# EAGLE board 7seg2 (EAGLE 9.1.2)
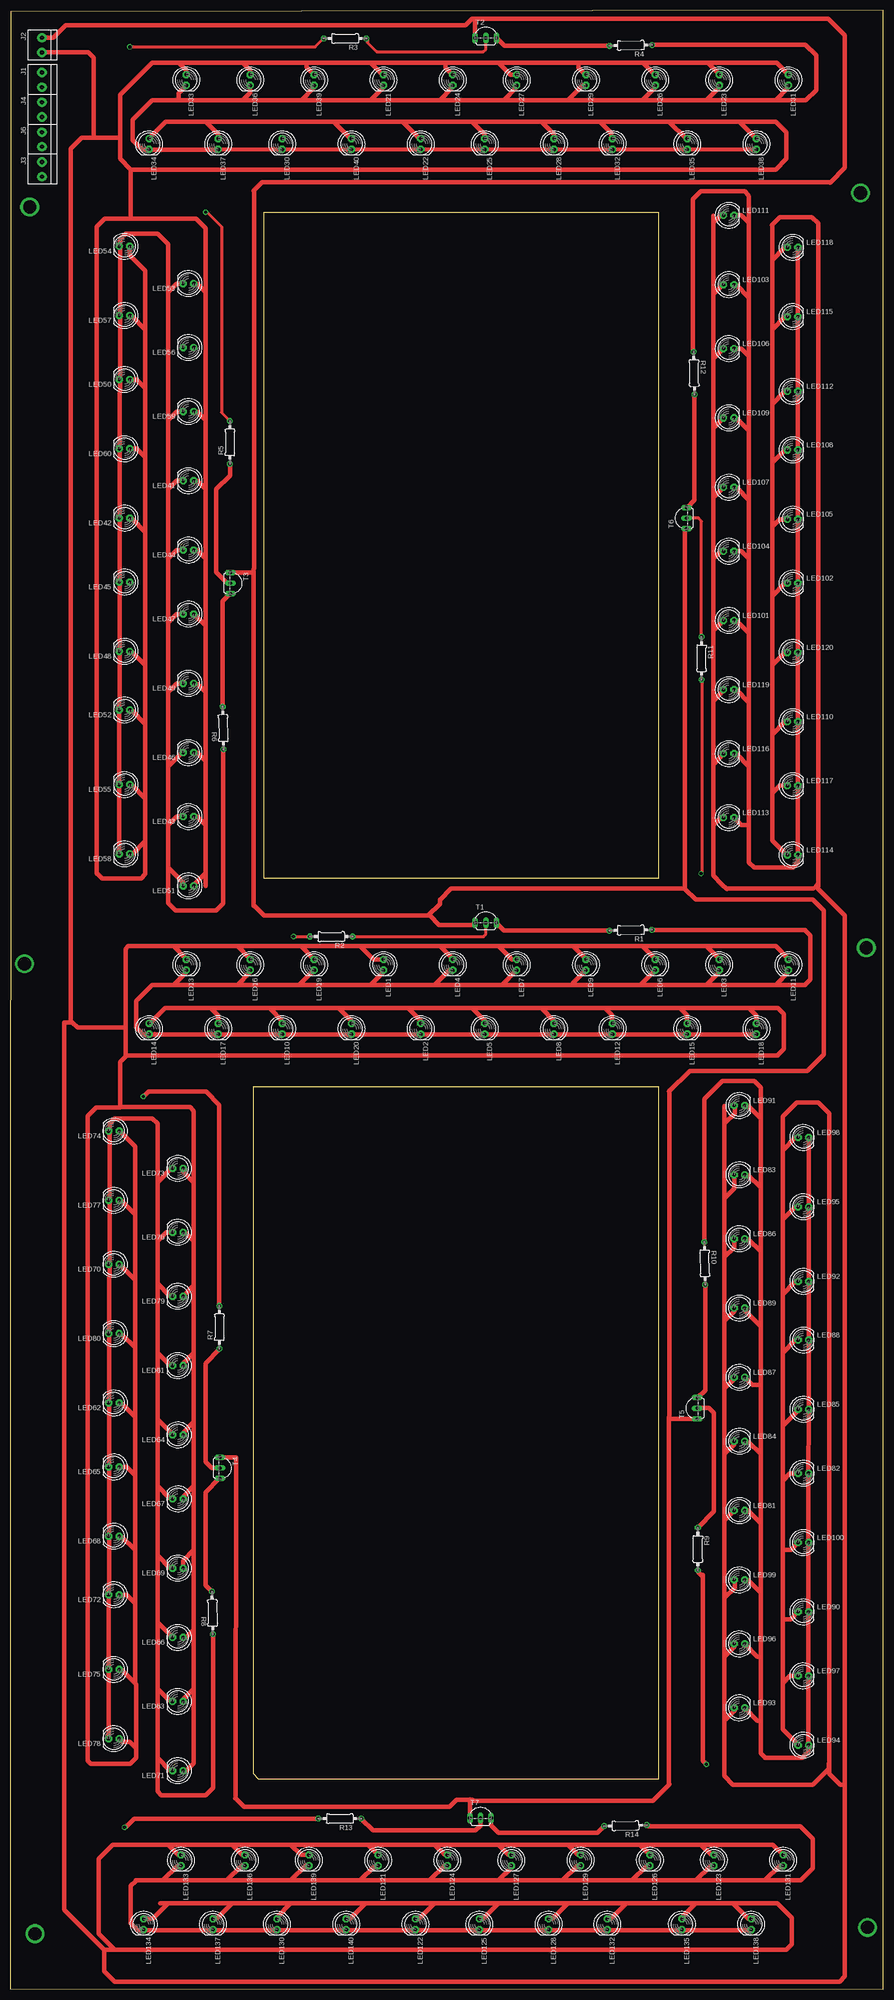
[diagram p0: board, top side]
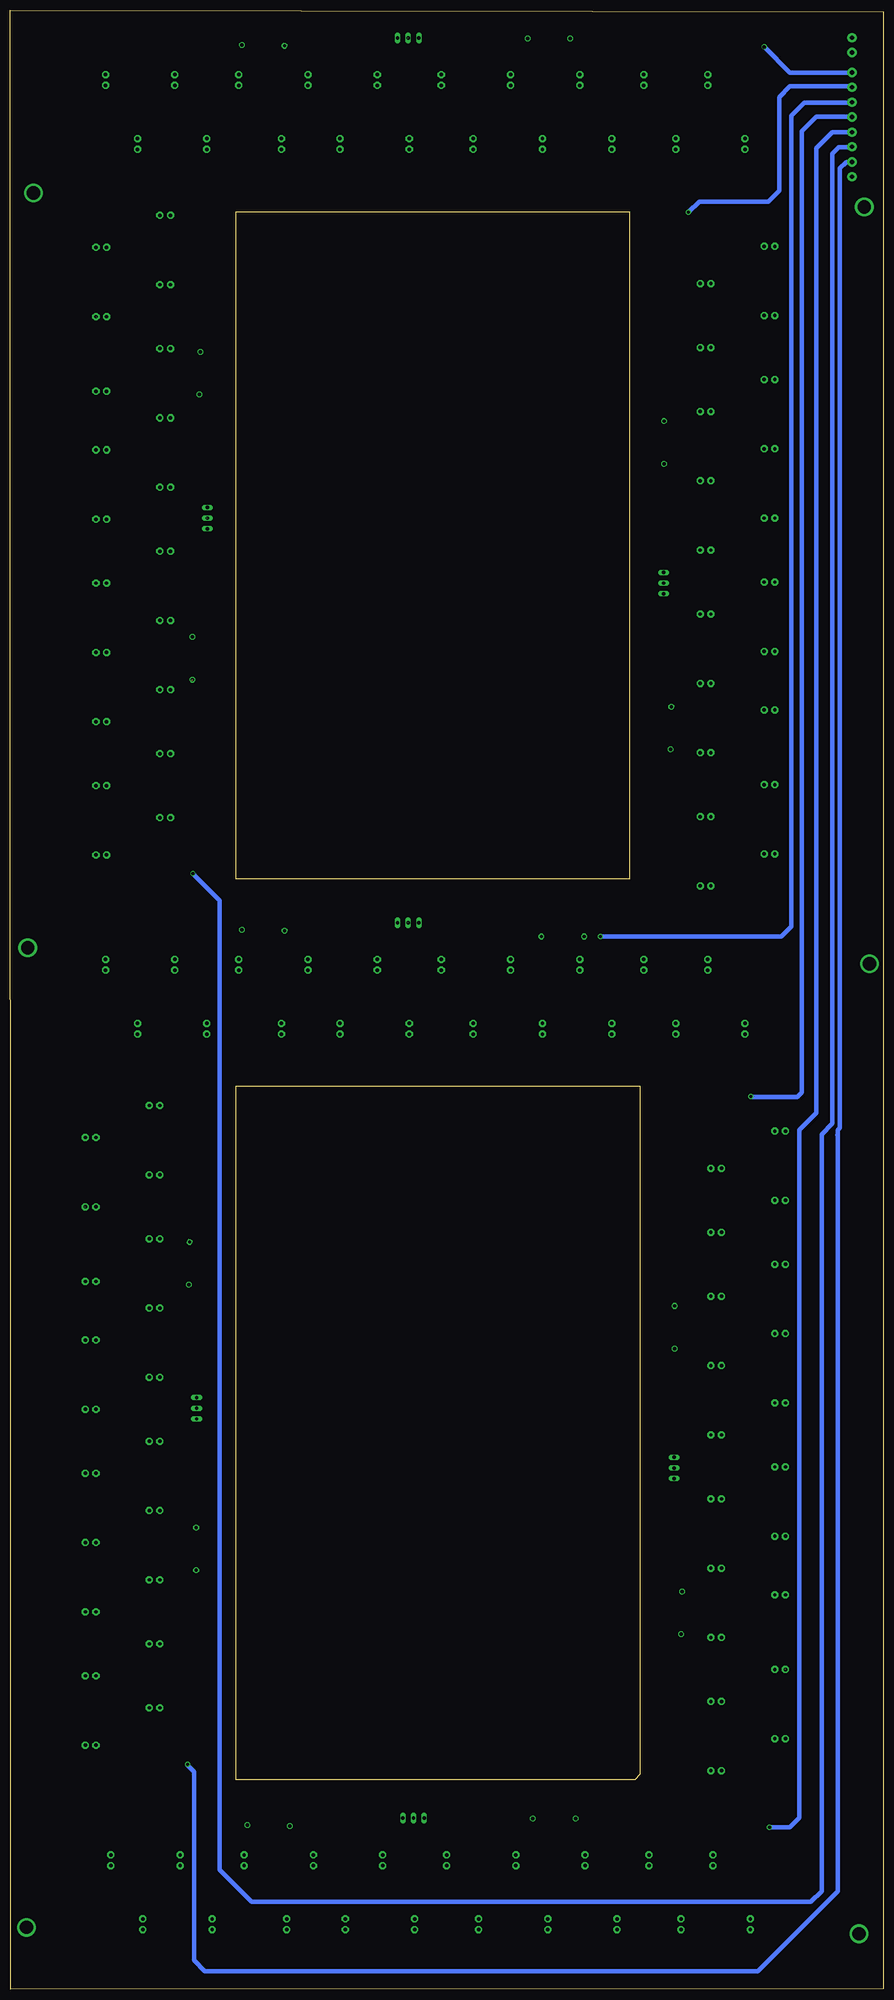
[diagram p1: board, bottom side, seen from below]

Size 208.07 x 471.41 mm. Coordinates in mm from the lower left corner, seen from the top.
Outline: 0,0.06 208.06,0 208.07,471.41 0.02,471.09 0,0.06
Outline: 60.45,423.36 154.43,423.36 154.43,264.61 60.45,264.61 60.45,423.36
Outline: 57.91,215.08 154.43,215.08 154.43,49.98 59.18,49.98 57.91,51.25 57.91,215.08
Copper layers (1*16): Top 0.035mm / dielectric 1.5mm / Bottom 0.035mm
Design rules "default": minimum track width 6mil, minimum drill 0.35mm, track to track 6mil, track to pad 6mil, pad to pad 6mil, via to via 6mil, smd to smd 6mil, copper to edge 40mil, drill to drill 6mil, minimum pad ring 10mil, minimum via ring 8mil, stop-mask expansion 4mil, vias tented up to drill 0mil, thermal gap 10mil
Net classes: 0 default: width 0.762 mm, drill 0.762 mm, clearance 0.635 mm; 1 power: width 1.016 mm, drill 0.762 mm, clearance 0.762 mm

## Footprints (pad centres in the part's own frame; a part is rotated, then mirrored left to right if it is on the bottom)
1X2-3.5MM = drill 1 pad 2.184: 1 1.8,0; 2 -1.7,0
LED5MM = drill 0.813 pad 1.676 octagon: A -1.27,0; K 1.27,0
BEAGLEBONEBLACK_MOUNTING_HOLE = drill 3.175 pad 4.445: P$1 0,0
0207/10 = drill 0.813 octagon: 1 -5.08,0; 2 5.08,0
TO92-EBC-OVAL = drill 0.813 long: B 0,-1.27; C 2.54,-1.27; E -2.54,-1.27

## Placement (x,y rotation side)
J1  1X2-3.5MM  [1X2-3.5MM]  7.49,454.86 90 top
J2  1X2-3.5MM  [1X2-3.5MM]  7.49,463.11 90 top
J3  1X2-3.5MM  [1X2-3.5MM]  7.49,433.52 90 top
J4  1X2-3.5MM  [1X2-3.5MM]  7.49,447.74 90 top
J6  1X2-3.5MM  [1X2-3.5MM]  7.49,440.63 90 top
LED1  [LED5MM]  88.9,244.04 270 top
LED2  [LED5MM]  97.79,228.8 270 top
LED3  [LED5MM]  168.91,244.04 270 top
LED4  [LED5MM]  105.41,244.04 270 top
LED5  [LED5MM]  113.03,228.8 270 top
LED6  [LED5MM]  153.67,244.04 270 top
LED7  [LED5MM]  120.65,244.04 270 top
LED8  [LED5MM]  129.54,228.8 270 top
LED9  [LED5MM]  137.16,244.04 270 top
LED10  [LED5MM]  64.77,228.8 270 top
LED11  [LED5MM]  185.42,244.04 270 top
LED12  [LED5MM]  143.51,228.8 270 top
LED13  [LED5MM]  41.91,244.04 270 top
LED14  [LED5MM]  33.02,228.8 270 top
LED15  [LED5MM]  161.29,228.8 270 top
LED16  [LED5MM]  57.15,244.04 270 top
LED17  [LED5MM]  49.53,228.8 270 top
LED18  [LED5MM]  177.8,228.8 270 top
LED19  [LED5MM]  72.39,244.04 270 top
LED20  [LED5MM]  81.28,228.8 270 top
LED21  [LED5MM]  88.9,454.86 270 top
LED22  [LED5MM]  97.79,439.62 270 top
LED23  [LED5MM]  168.91,454.86 270 top
LED24  [LED5MM]  105.41,454.86 270 top
LED25  [LED5MM]  113.03,439.62 270 top
LED26  [LED5MM]  153.67,454.86 270 top
LED27  [LED5MM]  120.65,454.86 270 top
LED28  [LED5MM]  129.54,439.62 270 top
LED29  [LED5MM]  137.16,454.86 270 top
LED30  [LED5MM]  64.77,439.62 270 top
LED31  [LED5MM]  185.42,454.86 270 top
LED32  [LED5MM]  143.51,439.62 270 top
LED33  [LED5MM]  41.91,454.86 270 top
LED34  [LED5MM]  33.02,439.62 270 top
LED35  [LED5MM]  161.29,439.62 270 top
LED36  [LED5MM]  57.15,454.86 270 top
LED37  [LED5MM]  49.53,439.62 270 top
LED38  [LED5MM]  177.8,439.62 270 top
LED39  [LED5MM]  72.39,454.86 270 top
LED40  [LED5MM]  81.28,439.62 270 top
LED41  [LED5MM]  42.42,359.35 180 top
LED42  [LED5MM]  27.18,350.46 180 top
LED43  [LED5MM]  42.42,279.34 180 top
LED44  [LED5MM]  42.42,342.84 180 top
LED45  [LED5MM]  27.18,335.22 180 top
LED46  [LED5MM]  42.42,294.58 180 top
LED47  [LED5MM]  42.42,327.6 180 top
LED48  [LED5MM]  27.18,318.71 180 top
LED49  [LED5MM]  42.42,311.09 180 top
LED50  [LED5MM]  27.18,383.48 180 top
LED51  [LED5MM]  42.42,262.83 180 top
LED52  [LED5MM]  27.18,304.74 180 top
LED53  [LED5MM]  42.42,406.34 180 top
LED54  [LED5MM]  27.18,415.23 180 top
LED55  [LED5MM]  27.18,286.96 180 top
LED56  [LED5MM]  42.42,391.1 180 top
LED57  [LED5MM]  27.18,398.72 180 top
LED58  [LED5MM]  27.18,270.45 180 top
LED59  [LED5MM]  42.42,375.86 180 top
LED60  [LED5MM]  27.18,366.97 180 top
LED61  [LED5MM]  39.88,148.53 180 top
LED62  [LED5MM]  24.64,139.64 180 top
LED63  [LED5MM]  39.88,68.52 180 top
LED64  [LED5MM]  39.88,132.02 180 top
LED65  [LED5MM]  24.64,124.4 180 top
LED66  [LED5MM]  39.88,83.76 180 top
LED67  [LED5MM]  39.88,116.78 180 top
LED68  [LED5MM]  24.64,107.89 180 top
LED69  [LED5MM]  39.88,100.27 180 top
LED70  [LED5MM]  24.64,172.66 180 top
LED71  [LED5MM]  39.88,52.01 180 top
LED72  [LED5MM]  24.64,93.92 180 top
LED73  [LED5MM]  39.88,195.52 180 top
LED74  [LED5MM]  24.64,204.41 180 top
LED75  [LED5MM]  24.64,76.14 180 top
LED76  [LED5MM]  39.88,180.28 180 top
LED77  [LED5MM]  24.64,187.9 180 top
LED78  [LED5MM]  24.64,59.63 180 top
LED79  [LED5MM]  39.88,165.04 180 top
LED80  [LED5MM]  24.64,156.15 180 top
LED81  [LED5MM]  173.73,113.99 0 top
LED82  [LED5MM]  188.97,122.88 0 top
LED83  [LED5MM]  173.73,194 0 top
LED84  [LED5MM]  173.73,130.5 0 top
LED85  [LED5MM]  188.97,138.12 0 top
LED86  [LED5MM]  173.73,178.76 0 top
LED87  [LED5MM]  173.73,145.74 0 top
LED88  [LED5MM]  188.97,154.63 0 top
LED89  [LED5MM]  173.73,162.25 0 top
LED90  [LED5MM]  188.97,89.86 0 top
LED91  [LED5MM]  173.73,210.51 0 top
LED92  [LED5MM]  188.97,168.6 0 top
LED93  [LED5MM]  173.73,67 0 top
LED94  [LED5MM]  188.97,58.11 0 top
LED95  [LED5MM]  188.97,186.38 0 top
LED96  [LED5MM]  173.73,82.24 0 top
LED97  [LED5MM]  188.97,74.62 0 top
LED98  [LED5MM]  188.97,202.89 0 top
LED99  [LED5MM]  173.73,97.48 0 top
LED100  [LED5MM]  188.97,106.37 0 top
LED101  [LED5MM]  171.19,326.08 0 top
LED102  [LED5MM]  186.43,334.97 0 top
LED103  [LED5MM]  171.19,406.09 0 top
LED104  [LED5MM]  171.19,342.59 0 top
LED105  [LED5MM]  186.43,350.21 0 top
LED106  [LED5MM]  171.19,390.85 0 top
LED107  [LED5MM]  171.19,357.83 0 top
LED108  [LED5MM]  186.43,366.72 0 top
LED109  [LED5MM]  171.19,374.34 0 top
LED110  [LED5MM]  186.43,301.95 0 top
LED111  [LED5MM]  171.19,422.6 0 top
LED112  [LED5MM]  186.43,380.69 0 top
LED113  [LED5MM]  171.19,279.09 0 top
LED114  [LED5MM]  186.43,270.2 0 top
LED115  [LED5MM]  186.43,398.47 0 top
LED116  [LED5MM]  171.19,294.33 0 top
LED117  [LED5MM]  186.43,286.71 0 top
LED118  [LED5MM]  186.43,414.98 0 top
LED119  [LED5MM]  171.19,309.57 0 top
LED120  [LED5MM]  186.43,318.46 0 top
LED121  [LED5MM]  87.63,30.68 270 top
LED122  [LED5MM]  96.52,15.44 270 top
LED123  [LED5MM]  167.64,30.68 270 top
LED124  [LED5MM]  104.14,30.68 270 top
LED125  [LED5MM]  111.76,15.44 270 top
LED126  [LED5MM]  152.4,30.68 270 top
LED127  [LED5MM]  119.38,30.68 270 top
LED128  [LED5MM]  128.27,15.44 270 top
LED129  [LED5MM]  135.89,30.68 270 top
LED130  [LED5MM]  63.5,15.44 270 top
LED131  [LED5MM]  184.15,30.68 270 top
LED132  [LED5MM]  142.24,15.44 270 top
LED133  [LED5MM]  40.64,30.68 270 top
LED134  [LED5MM]  31.75,15.44 270 top
LED135  [LED5MM]  160.02,15.44 270 top
LED136  [LED5MM]  55.88,30.68 270 top
LED137  [LED5MM]  48.26,15.44 270 top
LED138  [LED5MM]  176.53,15.44 270 top
LED139  [LED5MM]  71.12,30.68 270 top
LED140  [LED5MM]  80.01,15.44 270 top
MGT2  BEAGLEBONEBLACK_MOUNTING_HOLE  [BEAGLEBONEBLACK_MOUNTING_HOLE]  203.96,248.1 0 top
MGT3  BEAGLEBONEBLACK_MOUNTING_HOLE  [BEAGLEBONEBLACK_MOUNTING_HOLE]  4.57,424.63 0 top
MGT4  BEAGLEBONEBLACK_MOUNTING_HOLE  [BEAGLEBONEBLACK_MOUNTING_HOLE]  202.61,427.9 0 top
MGT6  BEAGLEBONEBLACK_MOUNTING_HOLE  [BEAGLEBONEBLACK_MOUNTING_HOLE]  3.3,244.29 0 top
MGT8  BEAGLEBONEBLACK_MOUNTING_HOLE  [BEAGLEBONEBLACK_MOUNTING_HOLE]  5.84,13.15 0 top
MGT9  BEAGLEBONEBLACK_MOUNTING_HOLE  [BEAGLEBONEBLACK_MOUNTING_HOLE]  204.23,14.69 0 top
R1  [0207/10]  147.83,252.29 181.2 top
R2  [0207/10]  76.45,250.77 180 top
R3  [0207/10]  79.75,464.76 180 top
R4  [0207/10]  147.83,463.11 181.2 top
R5  [0207/10]  52.32,368.5 90 top
R6  [0207/10]  50.67,300.42 91.2 top
R7  [0207/10]  49.78,157.68 90 top
R8  [0207/10]  48.13,89.6 91.2 top
R9  [0207/10]  163.83,104.84 270 top
R10  [0207/10]  165.48,172.92 271.2 top
R11  [0207/10]  164.72,317.06 270 top
R12  [0207/10]  162.94,385.01 271.2 top
R13  [0207/10]  78.48,40.58 180 top
R14  [0207/10]  146.56,38.93 181.2 top
T1  2N2222  [TO92-EBC-OVAL]  113.28,255.34 0 top
T2  2N2222  [TO92-EBC-OVAL]  113.28,466.16 0 top
T3  2N2222  [TO92-EBC-OVAL]  53.72,334.97 270 top
T4  2N2222  [TO92-EBC-OVAL]  51.18,124.15 270 top
T5  2N2222  [TO92-EBC-OVAL]  162.43,138.37 90 top
T6  2N2222  [TO92-EBC-OVAL]  159.89,350.46 90 top
T7  2N2222  [TO92-EBC-OVAL]  112.01,41.98 0 top

## Library data of the parts
J1-J4 J6 LED1-LED140 T1-T7 = adafruit
MGT2-MGT4 MGT6 MGT8 MGT9 = BeagleBone_Black_Wireless
R1-R14 = resistor

## Nets
N$4: R2.2
N$5: R2.1 T1.B
N$10: R3.1 T2.B
N$12: R3.2
N$17: T3.B
N$18 [power]: LED55.K
N$19: R5.2
N$24 [power]: T4.B
N$25 [power]: LED75.K
N$32 [power]: LED98.K
N$38: R11.1 T6.B
N$39 [power]: LED118.K
N$40: R11.2
N$45: T7.B
N$47: R13.2
S$9 [power]: R14.1
S$46: R8.2
S$52: R9.1
S$53 [power]: R10.2
S$54 [power]: R14.2
S$55 [power]: R4.2
S$56 [power]: R12.2
S$57: R5.1
S$58 [power]: R6.2
S$59 [power]: R1.2
S$142 [power]: T6.E
S$153 [power]: LED32.K
S$154 [power]: LED35.K
S$166 [power]: LED52.K
S$176 [power]: LED12.K
S$177 [power]: LED15.K
S$188 [power]: LED72.K
S$189 [power]: R10.1
S$200 [power]: LED132.K
S$201 [power]: LED135.K
S$202 [power]: R12.1
S$213 [power]: LED92.K
S$214 [power]: LED95.K
S$227 [power]: LED112.K
S$228 [power]: LED115.K

## Tracks (layer width: path | path; a pad name or v marks a point on that pad's centre or on a via)
GND
  Top 1.016: 157.1,214.06 157.1,136.47 156.97,136.34 156.97,135.83 | 156.97,135.83 163.57,135.83 | 156.97,135.83 156.97,48.71 157.1,48.84
GND1
  Top 1.016: 189.48,450.03 182.37,450.03 | 182.37,450.03 165.86,450.03 | 165.86,450.03 150.62,450.03 | 150.62,450.03 132.84,450.03 | 132.84,450.03 117.6,450.03 | 117.6,450.03 102.36,450.03 | 102.36,450.03 85.85,450.03 | 85.85,450.03 69.34,450.03 | 69.34,450.03 55.37,450.03 | 55.37,450.03 40.13,450.03 | 40.13,450.03 33.78,450.03 29.08,445.33 29.08,440.5 31.37,438.22 | 40.13,450.03 40.13,451.68 41.91,453.46 | 55.37,450.03 57.15,451.81 57.15,453.46 | 69.34,450.03 72.39,453.08 72.39,453.46 | 85.85,450.03 88.9,453.08 88.9,453.46 | 102.36,450.03 105.28,452.95 105.28,453.59 | 117.6,450.03 120.65,453.08 120.65,453.59 | 132.84,450.03 136.4,453.59 137.16,453.59 | 150.62,450.03 153.67,453.08 153.67,453.46 | 165.86,450.03 168.91,453.08 168.91,453.59 | 182.37,450.03 185.42,453.08 185.42,453.59
GND2
  Top 1.016: 37.59,267.15 37.59,258.77 39.37,256.99 49.02,256.99 50.67,258.64 | 37.59,267.15 37.59,277.31 | 37.59,277.31 37.59,291.28 | 37.59,291.28 37.59,309.06 | 37.59,309.06 37.59,325.57 | 37.59,325.57 37.59,340.81 | 37.59,340.81 37.59,357.32 | 37.59,357.32 37.59,373.83 | 37.59,373.83 37.59,404.31 | 37.59,404.31 37.59,415.74 | 37.59,267.15 41.15,263.59 41.15,262.96 | 37.59,277.31 39.62,279.34 41.27,279.34 | 37.59,291.28 41.02,294.71 41.27,294.71 | 37.59,309.06 39.62,311.09 41.15,311.09 | 37.59,325.57 39.62,327.6 41.15,327.6 | 37.59,340.81 39.62,342.84 41.27,342.84 | 37.59,357.32 39.62,359.35 41.15,359.35 | 37.59,373.83 39.62,375.86 41.15,375.86 | 37.59,404.31 39.62,406.34 41.27,406.34
GND3
  Top 1.016: 189.48,239.21 189.23,239.21 182.37,239.21 | 182.37,239.21 165.86,239.21 | 165.86,239.21 150.11,239.21 | 150.11,239.21 134.11,239.21 | 134.11,239.21 117.09,239.21 | 117.09,239.21 101.09,239.21 | 101.09,239.21 85.85,239.21 | 85.85,239.21 68.83,239.21 | 68.83,239.21 54.1,239.21 | 54.1,239.21 38.86,239.21 | 38.86,239.21 33.78,239.21 | 38.86,239.21 41.78,242.13 41.78,242.77 | 54.1,239.21 57.15,242.26 57.15,242.64 | 85.85,239.21 88.9,242.26 88.9,242.77 | 68.83,239.21 72.39,242.77 | 101.09,239.21 104.52,242.64 105.41,242.64 | 117.09,239.21 120.65,242.77 | 134.11,239.21 134.11,239.72 137.16,242.77 | 150.11,239.21 153.54,242.64 | 165.86,239.21 168.91,242.26 168.91,242.77 | 182.37,239.21 185.54,242.38 185.54,242.64
GND4
  Top 1.016: 35.05,55.06 35.05,49.34 35.05,47.95 35.05,47.06 35.94,46.17 46.48,46.17 48.26,47.95 | 35.05,55.06 35.05,71.57 | 35.05,71.57 35.05,88.08 | 35.05,88.08 35.05,103.32 | 35.05,103.32 35.05,119.83 | 35.05,119.83 35.05,136.34 | 35.05,136.34 35.05,151.58 | 35.05,151.58 35.05,168.09 | 35.05,168.09 35.05,178.25 | 35.05,178.25 35.05,192.22 | 35.05,192.22 35.05,206.19 | 35.05,55.06 38.1,52.01 38.61,52.01 | 35.05,71.57 37.97,68.65 38.61,68.65 | 35.05,88.08 35.05,87.32 38.61,83.76 | 35.05,103.32 38.1,100.27 38.61,100.27 | 35.05,119.83 37.97,116.91 38.61,116.91 | 35.05,136.34 35.05,135.7 38.73,132.02 | 35.05,151.58 38.1,148.53 38.61,148.53 | 35.05,168.09 37.97,165.17 38.61,165.17 | 35.05,178.25 37.08,180.28 38.61,180.28 | 35.05,192.22 38.35,195.52 38.48,195.52
GND5
  Top 1.016: 188.21,25.85 179.83,25.85 | 179.83,25.85 163.32,25.85 | 163.32,25.85 148.08,25.85 | 148.08,25.85 131.57,25.85 | 131.57,25.85 116.33,25.85 | 116.33,25.85 102.36,25.85 99.82,25.85 | 99.82,25.85 83.31,25.85 | 83.31,25.85 66.8,25.85 | 66.8,25.85 51.56,25.85 | 51.56,25.85 36.32,25.85 | 36.32,25.85 29.84,25.85 29.84,25.72 28.7,24.58 28.7,15.69 30.22,14.17 | 179.83,25.85 183.39,29.41 184.15,29.41 | 163.32,25.85 166.88,29.41 167.76,29.41 | 148.08,25.85 151.51,29.28 152.52,29.28 | 131.57,25.85 135.13,29.41 135.76,29.41 | 116.33,25.85 119.38,28.9 119.38,29.41 | 99.82,25.85 103.5,29.53 104.14,29.53 | 83.31,25.85 86.74,29.28 87.75,29.28 | 66.8,25.85 70.48,29.53 71.12,29.53 | 51.56,25.85 55.12,29.41 55.88,29.41 | 36.32,25.85 39.88,29.41 40.76,29.41
GND6
  Top 1.016: 178.81,214.57 178.81,207.46 | 178.81,207.46 178.81,190.95 | 178.81,190.95 178.81,175.71 | 178.81,175.71 178.81,157.93 | 178.81,157.93 178.81,143.96 | 178.81,143.96 178.81,127.45 | 178.81,127.45 178.81,110.94 | 178.81,110.94 178.81,94.43 | 178.81,94.43 178.81,79.19 | 178.81,79.19 178.81,63.95 | 178.81,63.95 178.81,56.2 179.83,55.19 179.83,55.06 188.72,55.06 190.12,56.46 | 178.81,207.46 175.77,210.51 175,210.51 | 178.81,190.95 175.77,194 175,194 | 178.81,175.71 175.77,178.76 175,178.76 | 178.81,157.93 175,161.74 175,162.25 | 178.81,143.96 176.78,143.96 175,145.74 | 178.81,127.45 175.89,130.37 175,130.37 | 178.81,110.94 175.77,113.99 175,113.99 | 178.81,94.43 175.77,97.48 175,97.48 | 178.81,79.19 178.05,79.19 175,82.24 | 178.81,63.95 178.05,63.95 175,67
GND7
  Top 1.016: 176.02,427.17 176.02,420.82 | 176.02,420.82 176.02,403.04 | 176.02,403.04 176.02,389.07 | 176.02,389.07 176.02,371.29 | 176.02,371.29 176.02,354.78 | 176.02,354.78 176.02,340.81 | 176.02,340.81 176.02,323.03 | 176.02,323.03 176.02,306.52 | 176.02,306.52 176.02,291.28 | 176.02,291.28 176.02,277.31 | 176.02,277.31 176.02,268.42 177.29,267.15 186.43,267.15 187.7,268.42 | 176.02,420.82 174.24,422.6 172.46,422.6 | 176.02,403.04 172.97,406.09 172.59,406.09 | 176.02,389.07 174.24,390.85 172.34,390.85 | 176.02,371.29 172.97,374.34 172.46,374.34 | 176.02,354.78 173.1,357.7 172.46,357.7 | 176.02,340.81 174.24,342.59 172.46,342.59 | 176.02,323.03 173.1,325.95 172.46,325.95 | 176.02,306.52 172.97,309.57 172.59,309.57 | 176.02,291.28 172.97,294.33 172.59,294.33 | 176.02,277.31 174.24,277.31 172.46,279.09
N$4
  Top 0.762: 67.31,250.77 R2.2
N$5  (1 unrouted)
  Top 0.762: R2.1 87.25,250.77 112.77,250.77 113.28,251.27 T1.B
N$10  (1 unrouted)
  Top 0.762: R3.1 85.09,464.51 85.09,463.75 87.25,461.59 112.77,461.59 113.28,462.09 T2.B
N$12
  Top 0.762: 28.3,462.73 72.64,462.73 R3.2
N$18
  Top 0.762: 25.92,286.98 LED55.K
N$19
  Top 0.762: R5.2 50.29,375.61 50.29,419.95 46.76,423.49 46.35,423.49
N$24
  Top 1.016: 49.78,152.34 46.48,149.04 46.48,125.58 47.91,124.15 T4.B | T4.B
N$25  (1 unrouted)
  Top 0.762: 23.38,76.16 LED75.K
N$26
  Top 1.016: 31.75,212.67 32.89,213.81 46.61,213.81 49.78,210.63 49.78,162.76
N$33
  Top 1.016: 164.97,98.62 164.97,98.24 | 164.97,98.24 164.97,54.42 165.86,53.54 | 164.97,98.24 163.95,99.26 163.95,99.64
N$38  (1 unrouted)
  Top 0.762: R11.1 164.72,349.7 163.95,350.46 T6.B
N$40  (1 unrouted)
  Top 0.762: 164.72,311.91 164.72,265.79
N$45
  Top 1.016: 83.69,40.45 86.36,37.79 110.87,37.79 112.01,38.93 T7.B
N$47
  Top 1.016: R13.2 29.46,40.58 27.43,38.55
S$1
  Top 1.016: 43.69,262.83 43.69,263.09 46.48,265.88 | 43.81,279.34 44.45,279.34 46.48,277.31 | 46.48,265.88 46.48,262.83 | 43.69,294.58 44.45,294.58 46.48,292.55 | 46.48,277.31 46.48,265.88 | 43.69,310.96 44.57,310.96 46.48,309.06 | 46.48,292.55 46.48,277.31 | 43.69,327.6 46.48,324.81 46.48,324.3 | 46.48,309.06 46.48,292.55 | 43.69,342.84 44.45,342.84 46.48,340.81 | 46.48,324.3 46.48,309.06 | 43.69,359.35 44.45,359.35 46.48,357.32 | 46.48,340.81 46.48,324.3 | 43.81,375.86 44.45,375.86 46.48,373.83 | 46.48,357.32 46.48,340.81 | 43.69,406.34 44.45,406.34 46.48,404.31 | 46.48,373.83 46.48,357.32 | 46.48,404.31 46.48,373.83 | 46.48,404.31 46.48,419.55 44.19,421.84 28.45,421.84 | 28.45,421.84 28.7,422.09 28.7,433.52 | 28.7,433.52 182.37,433.52 | 28.7,433.52 26.16,436.06 26.16,441.14 26.16,451.3 33.78,458.92 | 28.45,421.84 22.48,421.84 20.57,419.93
S$2  (via drill 0.76)
  Bottom 1.016: v28.45,462.73 22.35,456.63 7.49,456.63
S$3
  Bottom 1.016: 7.49,446.09 16,446.09 19.41,442.68 19.41,213.67 20.54,212.54 31.62,212.54
S$4
  Bottom 1.016: 7.49,442.41 12.19,442.41 16,438.6 16,208.73 19.81,204.92
S$5  (via drill 0.76)
  other vias: 46.48,423.36
S$6  (via drill 0.76)
  Bottom 1.016: 14.73,203.65 14.73,23.31 17.27,20.77 150.62,20.77 158.24,28.39 158.24,259.39 164.61,265.75 v164.61,265.77
S$7
  Bottom 1.016: 7.62,438.85 10.67,438.85 12.19,437.33 12.19,206.19 14.73,203.65
S$8
  Bottom 1.016: 67.31,250.77 24.38,250.77 21.97,253.18 21.97,446.35 18.92,449.39 7.49,449.39 7.36,449.52
S$11
  Top 1.016: 185.42,456.13 182.62,458.92 166.24,458.92 | 166.24,458.92 168.91,456.25 | 137.03,456.13 135.38,457.78 135.38,458.92 | 150.75,458.92 166.24,458.92 | 150.75,458.92 153.54,456.13 | 120.52,456.13 119.12,456.13 116.33,458.92 | 135.38,458.92 150.75,458.92 | 105.41,456 103.63,457.78 103.63,458.92 | 116.33,458.92 135.38,458.92 | 88.9,456.13 88.64,456.13 85.85,458.92 | 103.63,458.92 116.33,458.92 | 72.39,456.13 70.61,457.9 70.61,458.92 | 85.85,458.92 103.63,458.92 | 57.15,456.25 57.15,457.14 55.37,458.92 | 70.61,458.92 85.85,458.92 | 55.37,458.92 70.61,458.92 | 40.13,458.92 55.37,458.92 | 33.78,458.92 40.13,458.92 | 40.13,458.92 41.91,457.14 41.91,456.25
S$12
  Top 1.016: 7.49,461.46 18.54,461.46 19.81,460.19 19.81,441.14 21.08,441.14 26.16,441.14
S$13
  Top 1.016: 153.16,463.24 189.48,463.24 192.02,460.7 192.02,452.47 189.53,449.98
S$14
  Top 1.016: 31.24,438.22 49.02,438.22 | 49.02,438.22 49.78,438.22 | 49.02,438.22 177.67,438.35
S$15
  Top 1.016: 161.41,440.89 161.03,440.89 156.97,444.95 | 173.73,444.95 182.37,444.95 184.91,442.41 184.91,436.06 182.36,433.51 | 173.73,444.95 177.8,440.89 | 173.73,444.95 156.97,444.95 | 129.54,440.76 129.54,441.9 126.49,444.95 | 156.97,444.95 140.46,444.95 | 113.03,440.89 113.03,441.9 109.98,444.95 | 140.46,444.95 126.49,444.95 | 97.91,440.89 97.53,440.89 93.47,444.95 | 126.49,444.95 109.98,444.95 | 81.28,440.76 81.15,440.76 76.96,444.95 | 109.98,444.95 93.47,444.95 | 33.02,440.76 33.02,441.01 36.95,444.95 46.48,444.95 | 93.47,444.95 76.96,444.95 | 76.96,444.95 46.48,444.95 | 46.48,444.95 49.53,441.9 49.53,440.89 | 140.46,444.95 143.25,442.15 143.25,440.94
S$16
  Top 1.016: 7.49,464.89 10.16,464.89 13.21,467.94 108.46,467.94 109.98,469.46 | 110.74,464.89 110.74,469.46 109.98,469.46 | 109.98,469.46 193.8,469.46 194.94,469.46 198.88,465.52 198.88,433.9 195.51,430.54 | 195.51,430.54 195.32,430.34 | 195.51,430.54 60,430.54 57.91,428.44
S$17
  Top 1.016: 28.45,415.23 28.45,413.07 32.13,409.39 32.13,396.69 32.13,395.42 | 28.45,398.72 28.83,398.72 32.13,395.42 | 28.45,383.48 30.1,383.48 32.13,381.45 | 28.45,366.97 30.1,366.97 32.13,364.94 | 32.13,381.45 32.13,395.42 | 28.45,350.33 28.95,350.33 32.13,347.16 | 32.13,364.94 32.13,381.45 | 28.45,318.71 28.83,318.71 32.13,315.41 | 32.13,347.16 32.13,364.94 | 28.45,304.74 28.83,304.74 32.13,301.44 | 32.13,315.41 32.13,347.16 | 28.45,286.96 28.83,286.96 32.13,283.66 | 32.13,301.44 32.13,315.41 | 28.57,270.45 29.08,270.45 32.13,273.5 | 32.13,283.66 32.13,301.44 | 32.13,273.5 32.13,283.66 | 32.13,265.63 32.13,273.5
S$18
  Top 1.016: 20.57,419.68 20.57,265.88 | 20.57,265.88 20.57,265.75 20.7,265.63 | 20.57,265.88 21.84,264.61 31.11,264.61 32.13,265.63
S$19
  Top 1.016: 50.67,295.34 50.67,258.77
S$20
  Top 1.016: 25.91,270.58 26.16,417.01 27.43,418.28 35.05,418.28 37.59,415.74
S$21
  Top 1.016: 162.68,390.09 162.68,425.65 162.68,426.41 164.59,428.31 175,428.31 175.9,427.41
S$22
  Top 1.016: 185.16,414.85 184.46,414.85 181.54,411.93 | 181.54,420.38 181.48,420.31 | 185.16,398.47 184.59,398.47 181.54,395.42 | 181.54,420.38 181.54,411.93 | 185.16,380.56 184.46,380.56 181.54,377.64 | 181.54,411.93 181.54,395.42 | 185.42,366.59 184.46,366.59 181.54,363.67 | 181.54,395.42 181.54,377.64 | 185.16,286.71 183.32,286.71 181.54,284.93 | 185.04,270.2 181.54,273.69 181.54,284.93 | 185.16,350.08 183.19,350.08 181.54,348.43 | 181.54,377.64 181.54,363.67 | 185.16,334.97 184.59,334.97 181.54,331.92 | 181.54,363.67 181.54,348.43 | 185.16,301.95 184.59,301.95 181.54,298.9 | 185.16,318.46 184.59,318.46 181.54,315.41 | 181.54,298.9 181.54,284.93 | 181.54,348.43 181.54,331.92 | 181.54,331.92 181.54,315.41 | 181.54,315.41 181.54,298.9 | 192.53,420.69 191.01,422.22 183.39,422.22 181.54,420.38
S$23
  Top 1.016: 163.62,138.41 163.62,138.35 163.58,138.3
S$24
  Top 1.016: 187.7,268.42 187.7,414.85
S$25
  Top 1.016: 169.92,422.6 169.29,422.6 167.51,420.82 | 167.51,422.47 167.51,420.82 | 167.51,420.82 167.51,403.8 | 167.51,403.8 169.92,406.21 | 167.51,403.8 167.51,388.43 | 167.51,388.43 169.92,390.85 | 169.92,279.09 169.29,279.09 167.51,277.31 | 169.54,263.21 167.51,265.24 167.51,277.31 | 169.54,263.21 170.05,262.7 | 167.51,388.43 167.51,371.92 | 167.51,371.92 169.92,374.34 | 170.05,342.59 169.29,342.59 167.51,340.81 | 167.51,371.92 167.51,355.29 | 167.51,355.29 169.92,357.7 | 167.51,291.79 167.51,277.31 | 167.51,291.79 169.92,294.2 | 167.51,306.9 167.51,291.79 | 167.51,306.9 170.05,309.44 | 167.51,355.29 167.51,340.81 | 167.51,340.81 167.51,323.66 | 167.51,323.66 167.51,306.9 | 167.51,323.66 169.92,326.08 | 169.54,263.21 170.69,262.07 170.81,262.07
S$26
  Top 1.016: 192.53,262.7 192.53,263.34 | 192.53,263.34 192.53,420.44 | 192.53,263.34 191.89,262.7 | 191.89,262.7 191.39,262.2 170.81,262.2 | 191.89,262.7 192.78,261.82 | 191.89,262.7 198.88,255.72 198.88,253.18
S$27
  Top 1.016: 160.78,262.07 160.78,262.53 | 160.78,262.07 160.78,347.79 | 160.78,262.07 163.32,259.53 191.26,259.53 193.8,256.99 193.8,222.7 189.86,218.76 161.92,218.76 156.97,213.81
S$28
  Top 1.016: 178.81,214.32 178.81,214.83 177.29,216.35 169.67,216.35 165.38,212.07 165.38,178.05
S$29
  Top 1.016: 187.7,202.89 187.07,202.89 184.02,199.84 | 187.7,186.38 187.07,186.38 184.02,183.33 | 187.83,168.34 186.81,168.34 184.02,165.55 | 184.02,199.84 184.02,183.33 | 187.7,154.63 187.07,154.63 184.02,151.58 | 184.02,183.33 184.02,165.55 | 184.02,165.55 184.02,151.58 | 187.83,122.88 185.8,122.88 184.02,121.1 | 184.02,151.58 184.02,134.18 | 184.02,134.18 187.96,138.12 | 187.7,106.24 186.05,104.59 184.02,104.59 | 184.02,134.18 184.02,121.1 | 187.7,89.86 185.93,88.08 184.02,88.08 | 184.02,121.1 184.02,104.59 | 187.7,74.62 185.8,74.62 184.02,72.84 | 184.02,104.59 184.02,88.08 | 184.02,88.08 184.02,72.84 | 184.02,72.84 184.02,61.92 187.58,58.36 187.58,58.11 | 195.2,207.46 195.2,208.6 192.53,211.27 187.45,211.27 184.02,207.84 184.02,199.84
S$30
  Top 1.016: 172.59,210.51 172.59,208.6 170.18,206.19 | 172.46,193.87 172.46,190.7 170.18,188.41 | 170.18,206.19 170.18,210.38 | 172.46,178.76 172.46,176.73 170.18,174.44 | 170.18,188.41 170.18,206.19 | 172.46,162.25 172.46,161.49 170.18,159.2 | 170.18,174.44 170.18,188.41 | 170.18,159.2 170.18,174.44 | 172.46,130.37 172.46,129.74 170.18,127.45 | 170.18,127.45 170.18,143.13 | 170.18,143.13 170.18,159.2 | 172.59,97.35 172.59,95.57 170.18,93.16 | 170.18,111.7 170.18,127.45 | 170.18,111.7 172.46,113.99 | 172.46,82.11 172.46,81.48 170.18,79.19 | 170.18,93.16 170.18,111.7 | 170.18,79.19 170.18,93.16 | 170.18,63.95 170.18,79.19 | 170.18,63.95 172.59,66.36 172.59,67 | 195.07,53.79 195.07,52.52 191.26,48.71 172.21,48.71 170.18,50.74 170.18,63.95 | 170.18,143.13 172.47,145.42 172.47,145.71
S$31
  Top 1.016: 195.2,207.71 195.2,51.25 197.74,48.71 198.88,48.71
S$32
  Top 1.016: 190.12,56.2 190.24,202.89
S$34
  Top 1.016: 151.83,38.8 188.21,38.8 191.26,35.76 191.26,28.77 188.34,25.85
S$35
  Top 1.016: 176.65,16.71 175.89,16.71 172.21,20.39 | 181.48,20.39 181.1,20.39 | 181.1,20.39 174.75,20.39 172.21,20.39 | 160.02,16.71 160.02,17.09 163.32,20.39 | 142.24,16.71 143.13,16.71 146.81,20.39 | 172.21,20.39 163.32,20.39 | 128.27,16.83 129.28,16.83 132.84,20.39 | 163.32,20.39 146.81,20.39 | 111.76,16.71 112.65,16.71 116.33,20.39 | 146.81,20.39 132.84,20.39 | 96.52,16.71 97.41,16.71 101.09,20.39 | 132.84,20.39 116.33,20.39 | 80.01,16.71 80.9,16.71 84.58,20.39 | 116.33,20.39 101.09,20.39 | 63.62,16.71 63.62,17.21 66.8,20.39 | 101.09,20.39 84.58,20.39 | 48.26,16.71 49.15,16.71 52.83,20.39 | 84.58,20.39 66.8,20.39 | 66.8,20.39 52.83,20.39 | 52.83,20.39 37.59,20.39 | 37.59,20.39 35.68,20.39 | 37.59,20.39 33.91,16.71 31.87,16.71 | 181.1,20.39 182.75,20.39 186.18,16.96 186.18,10.61 184.91,9.34 181.1,9.34
S$36
  Top 1.016: 176.78,14.17 176.65,14.17 176.53,14.04 30.48,14.04
S$37
  Top 1.016: 24.89,1.72 197.61,1.72 198.88,2.99 198.88,51.25 198.88,255.47
S$38
  Top 1.016: 184.27,31.82 181.73,34.36 179.83,34.36 164.59,34.36 | 167.76,31.95 167,31.95 164.59,34.36 | 152.4,31.95 149.98,34.36 148.08,34.36 | 136.01,31.95 135.25,31.95 132.84,34.36 | 148.08,34.36 164.59,34.36 | 119.5,31.95 118.74,31.95 116.33,34.36 | 132.84,34.36 148.08,34.36 | 104.26,31.95 103.5,31.95 101.09,34.36 | 116.33,34.36 132.84,34.36 | 87.63,31.95 85.21,34.36 83.31,34.36 | 101.09,34.36 116.33,34.36 | 71.12,31.95 69.21,31.95 66.8,34.36 | 83.31,34.36 101.09,34.36 | 55.88,31.95 55.24,31.95 52.83,34.36 | 66.8,34.36 83.31,34.36 | 40.64,31.95 40,31.95 37.59,34.36 | 52.83,34.36 66.8,34.36 | 37.59,34.36 52.83,34.36 | 26.16,34.36 37.59,34.36
S$39
  Top 1.016: 49.91,126.69 53.72,126.69 53.62,45.41 | 53.59,45.41 53.62,45.38 53.62,45.41 | 53.62,45.41 55.65,43.38 104.65,43.38 106.3,45.03 110.11,45.03
S$40
  Top 1.016: 109.47,45.15 109.47,44.9 | 109.47,44.9 109.47,40.71 | 156.97,48.71 153.16,44.9 109.47,44.9
S$41
  Top 1.016: 48.26,84.27 48.26,47.95
S$42
  Top 1.016: 26.03,204.41 29.72,200.73 29.72,199.84 | 25.78,187.9 26.41,187.9 29.72,184.6 | 29.72,199.84 29.72,200.47 | 25.91,172.79 29.72,168.98 29.72,168.09 | 29.72,184.6 29.72,199.84 | 26.03,156.02 26.54,156.02 29.72,152.85 | 29.72,168.09 29.72,184.6 | 25.91,139.64 26.41,139.64 29.72,136.34 | 29.72,152.85 29.72,168.09 | 25.91,124.4 27.68,124.4 29.72,122.37 | 29.72,136.34 29.72,152.85 | 25.91,107.89 26.41,107.89 29.72,104.59 | 29.72,122.37 29.72,136.34 | 25.88,93.93 27.68,93.93 29.72,91.89 | 29.72,104.59 29.72,122.37 | 25.91,76.14 26.41,76.14 29.72,72.84 | 29.72,91.89 29.72,104.59 | 29.72,72.84 29.72,91.89 | 29.72,72.84 29.97,72.59 29.97,57.47 29.84,57.47 | 29.97,55.19 29.97,57.35 29.84,57.47 | 25.91,59.63 26.67,58.87 28.45,58.87 29.84,57.47
S$43
  Top 1.016: 23.37,59.76 23.62,206.19 24.89,207.46 33.78,207.46 35.05,206.19
S$44
  Top 1.016: 29.97,55.06 28.57,53.66 19.17,53.66 18.41,54.42 18.41,55.06 | 18.41,55.06 18.41,208 20.41,210 26.16,210 | 18.41,55.06 18.41,54.55
S$45
  Top 0.762: 31.62,212.67
S$46
  Top 0.762: 47.5,95.21 R8.2
  Top 1.016: R8.2 46.48,96.23 46.48,118.31 49.78,121.61
S$47
  Top 1.016: 189.48,252.29 189.35,252.29 | 189.35,252.29 153.03,252.29 | 189.35,252.29 190.62,251.02 190.62,240.48 189.35,239.21
S$48
  Top 1.016: 177.8,230.07 177.8,231.97 176.02,233.75 | 161.16,230.07 161.16,232.1 159.51,233.75 | 176.02,233.75 182.88,233.75 184.27,232.35 184.27,223.97 182.75,222.45 | 143.38,229.94 143.38,232.1 141.73,233.75 | 176.02,233.75 159.51,233.75 | 129.54,229.94 129.54,230.7 126.49,233.75 | 159.51,233.75 141.73,233.75 | 113.15,229.94 113.15,230.57 109.98,233.75 | 141.73,233.75 126.49,233.75 | 97.79,229.94 97.79,230.7 94.74,233.75 | 126.49,233.75 109.98,233.75 | 81.28,230.07 81.28,230.7 78.23,233.75 | 109.98,233.75 94.74,233.75 | 64.89,230.07 64.89,230.57 61.72,233.75 | 94.74,233.75 78.23,233.75 | 49.53,230.07 49.53,231.97 47.75,233.75 | 78.23,233.75 61.72,233.75 | 61.72,233.75 47.75,233.75 | 47.75,233.75 36.83,233.75 33.14,230.07 33.14,229.94
S$49
  Top 1.016: 32.52,227.45 34.41,227.53 | 32.52,227.45 177.92,227.4 | 32.52,227.45 31.57,227.45 29.97,229.05 29.97,235.4 33.78,239.21
S$50  (via drill 0.76)
  other vias: 165.86,53.54
S$51
  Bottom 1.016: 165.99,53.41 164.34,51.76 164.34,6.8 161.8,4.26 29.97,4.26 10.92,23.31 10.92,203.4 | 10.92,203.4 10.92,204.67 10.41,205.17 10.41,432.76 | 10.92,203.4 11.05,203.52 | 10.41,432.76 10.41,433.77 8.89,435.3 7.49,435.3 | 10.41,432.76 10.41,433.65
S$52
  Top 0.762: R9.1 164.08,110.18
  Top 1.016: R9.1 167.67,113.77 167.67,137.29 166.5,138.46 166.49,138.45 163.76,138.45
S$53
  Top 1.016: R10.2 165.58,142.67 163.83,140.91
S$54
  Top 0.762: 140.95,38.3 R14.2
  Top 1.016: R14.2 139.93,37.28 116.33,37.28 114.55,39.06 114.55,40.96
S$55
  Top 1.016: R4.2 117.71,463 116.08,464.63
S$56
  Top 1.016: R12.2 163.04,354.76 161.29,353
S$57
  Top 0.762: R5.1 52.07,363.16
  Top 1.016: R5.1 52.32,360.62 49.02,357.32 49.02,337.63 51.69,334.97 52.45,334.97
S$58
  Top 1.016: R6.2 50.56,330.67 52.32,332.43
S$59
  Top 1.016: R1.2 117.58,252.18 115.82,253.94
S$60
  Top 1.016: 57.91,428.31 58.04,428.31 58.04,338.4 57.91,338.27 57.91,337.51 | 57.91,337.51 52.58,337.51 | 57.91,337.51 57.91,265.88 57.91,258.26 | 57.91,258.26 60.45,255.72 98.55,255.72 99.55,255.72 | 99.55,255.72 102.31,258.48 102.31,259.48 | 102.31,259.48 102.36,259.53 | 99.55,255.72 99.95,255.72 102.11,253.56 110.11,253.56 110.67,254.13 | 57.91,258.26 57.91,258.01 | 102.31,259.48 105.03,262.2 160.73,262.2 160.73,262.21
S$63
  Bottom 1.016: 46.48,423.36 43.94,425.9 27.43,425.9 24.89,428.44 24.89,450.79 22.35,453.33 7.74,453.33 7.49,453.08
S$64  (via drill 0.76)
  Bottom 1.016: 19.81,204.92 20.06,204.67 20.06,40.84 22.35,38.55 v27.18,38.55
S$65  (via drill 0.76)
  other vias: 31.62,212.67
S$67  (via drill 0.76)
  other vias: 67.43,250.77
S$142
  Top 0.762: T6.E 160.78,347.54
S$153
  Top 0.762: 143.7,438.35 LED32.K
S$154
  Top 0.762: 161.27,438.36 LED35.K
S$166
  Top 0.762: 25.91,304.55 LED52.K
S$176
  Top 0.762: 143.7,227.53 LED12.K
S$177
  Top 0.762: 161.27,227.54 LED15.K
S$188
  Top 0.762: 23.37,93.73 LED72.K
S$200
  Top 0.762: 142.43,14.17 LED132.K
S$201
  Top 0.762: 160,14.18 LED135.K
S$213
  Top 0.762: 190.24,168.79 LED92.K
S$214  (1 unrouted)
  Top 0.762: 190.22,186.36 LED95.K
S$227
  Top 0.762: 187.7,380.88 LED112.K
S$228  (1 unrouted)
  Top 0.762: 187.68,398.45 LED115.K
VCC
  Top 1.016: 14.73,230.32 16,229.05 27.43,229.05 | 14.73,230.32 12.82,230.32 12.82,18.86 22.35,9.34 | 22.35,9.34 24.89,9.34 | 14.73,230.32 14.35,230.7 14.35,438.47 17.02,441.14 21.08,441.14 | 27.43,229.05 27.43,222.7 27.68,222.45 | 27.43,229.05 27.43,247.85 28.06,248.48 38.86,248.48 | 38.86,248.48 54.1,248.48 | 54.1,248.48 69.21,248.48 | 69.21,248.48 83.31,248.48 | 83.31,248.48 102.36,248.48 | 102.36,248.48 116.33,248.48 | 116.33,248.48 134.11,248.48 | 134.11,248.48 150.62,248.48 | 150.62,248.48 165.86,248.48 | 165.86,248.48 182.37,248.48 185.42,245.43 185.42,245.31 | 27.68,222.45 182.88,222.45 | 27.68,222.45 26.16,220.92 26.16,210.13 42.8,210.13 43.69,209.24 43.69,192.22 | 43.69,192.22 43.69,178.25 | 43.69,178.25 43.69,168.09 | 43.69,168.09 43.69,151.58 | 43.69,151.58 43.69,135.07 | 43.69,135.07 43.69,119.83 | 43.69,119.83 43.69,104.59 | 43.69,104.59 43.69,85.54 | 43.69,85.54 43.69,71.57 | 43.69,71.57 43.69,53.79 41.91,52.01 41.15,52.01 | 24.89,9.34 26.16,9.34 181.48,9.34 | 38.86,248.48 41.91,245.43 41.91,245.31 | 54.1,248.48 57.15,245.43 57.15,245.31 | 69.21,248.48 72.39,245.31 | 102.36,248.48 105.53,245.31 | 83.31,248.48 86.48,245.31 88.9,245.31 | 116.33,248.48 119.5,245.31 120.65,245.31 | 134.11,248.48 137.16,245.43 137.16,245.31 | 150.62,248.48 153.79,245.31 | 165.86,248.48 168.78,245.56 168.78,245.31 | 43.69,71.57 41.27,69.16 41.27,68.65 | 43.69,85.54 41.91,83.76 41.27,83.76 | 43.69,104.59 41.15,102.05 41.15,100.27 | 43.69,119.83 41.15,117.29 41.15,116.78 | 43.69,135.07 41.15,132.53 41.15,132.02 | 43.69,151.58 41.15,149.04 41.15,148.53 | 43.69,168.09 43.69,167.58 41.15,165.04 | 43.69,178.25 41.65,180.28 41.02,180.28
  Top 1.016: 43.69,192.22 41.15,194.76 41.15,195.52 | 22.35,9.34 22.35,4.26 24.89,1.72 | 24.89,9.34 21.08,13.15 21.08,31.06 24.38,34.36 26.92,34.36